# EAGLE board capstoneSchematic (EAGLE 9.6.2)
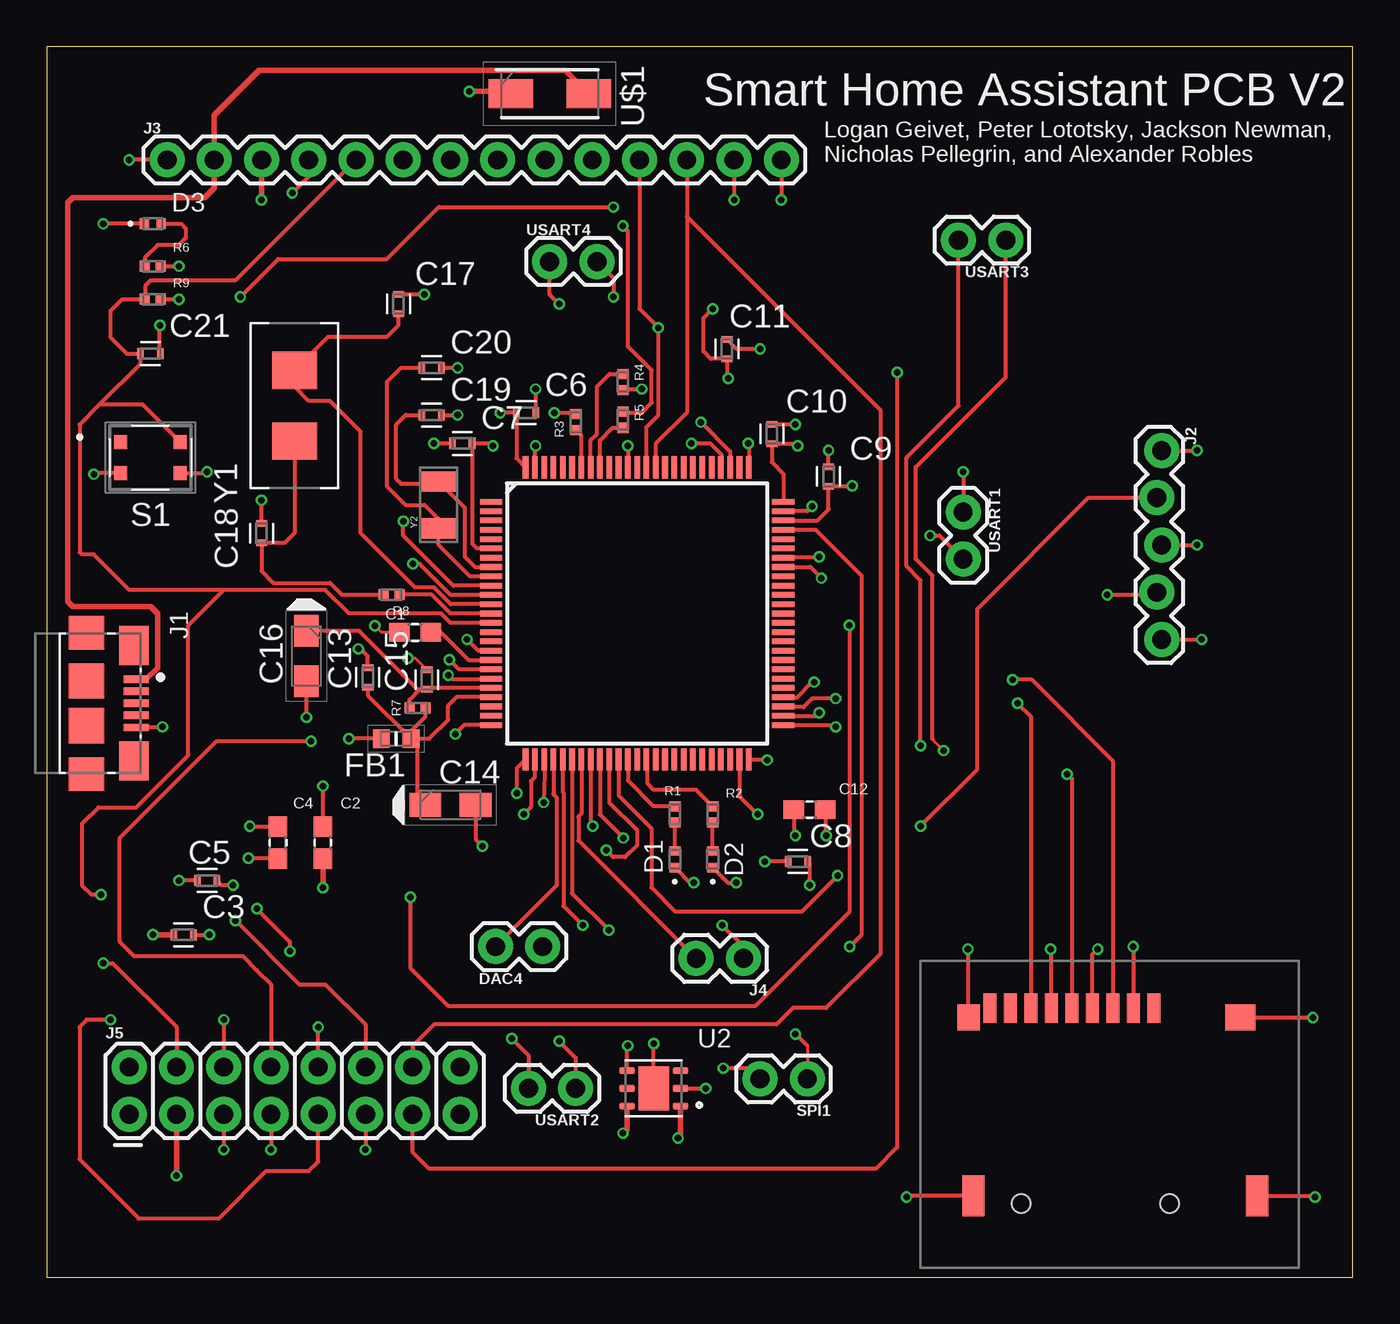
[diagram p0: board, top side]
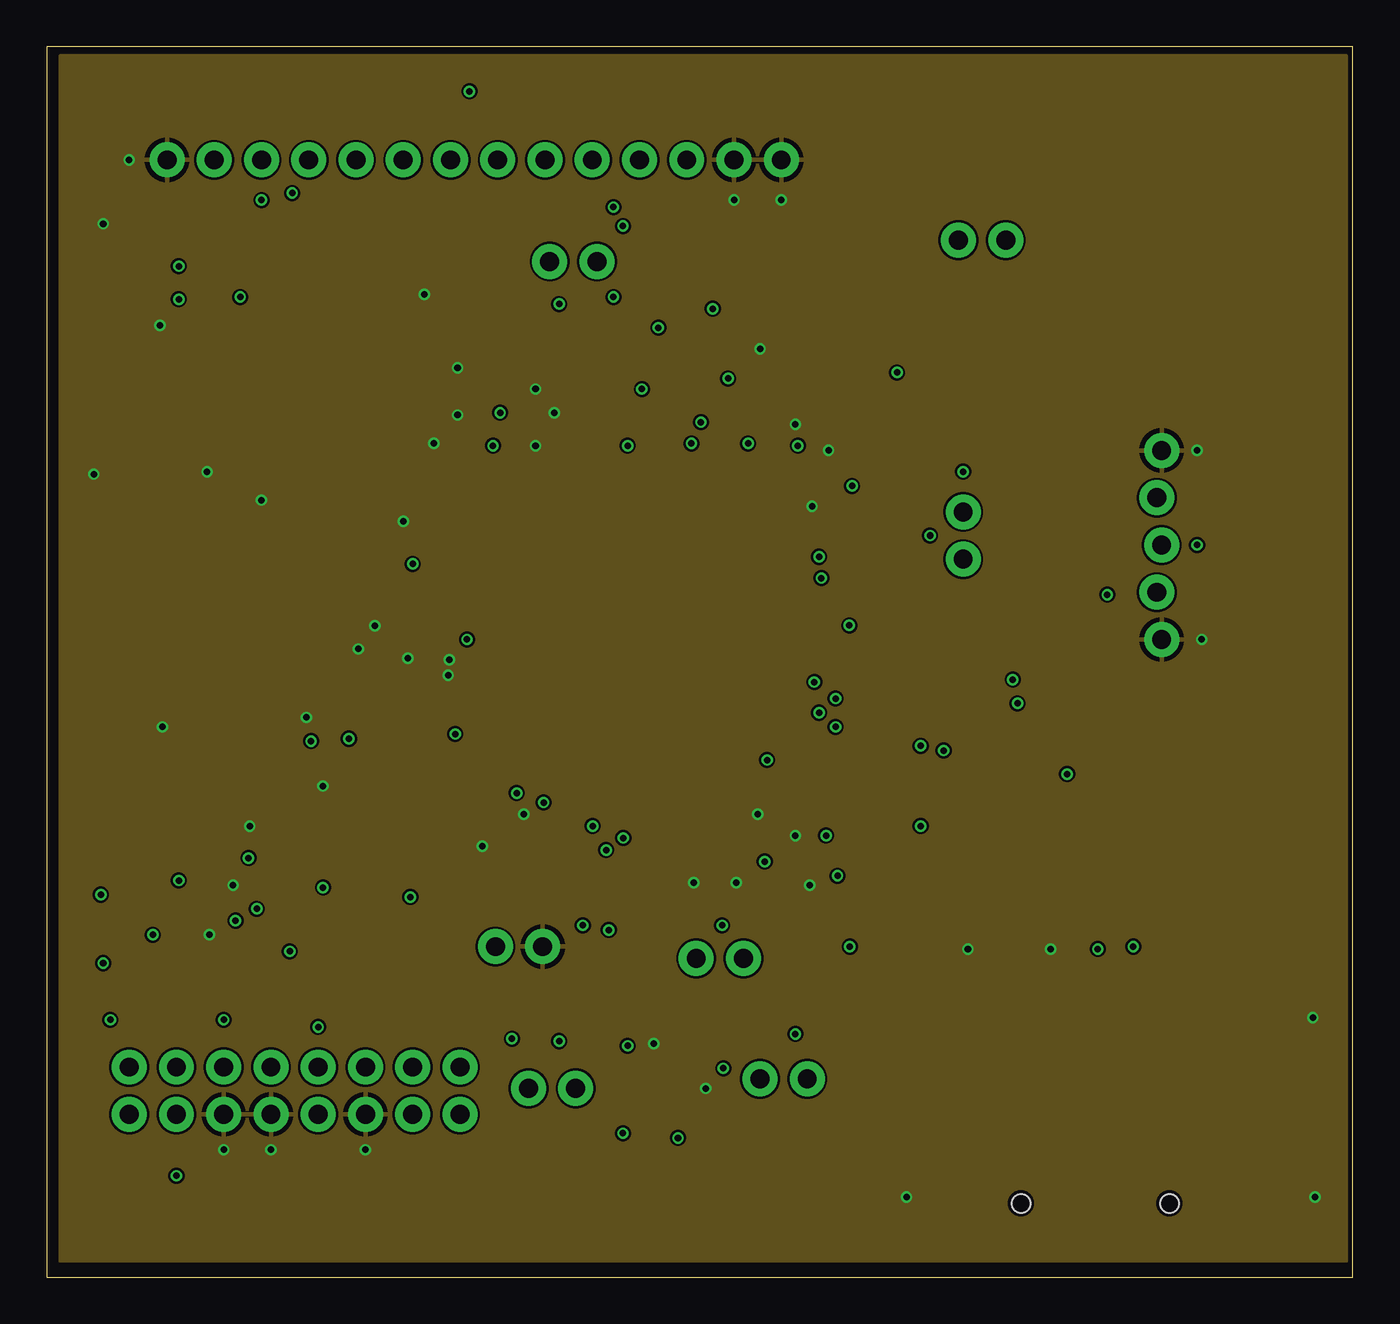
[diagram p1: board, inner layer Route2]
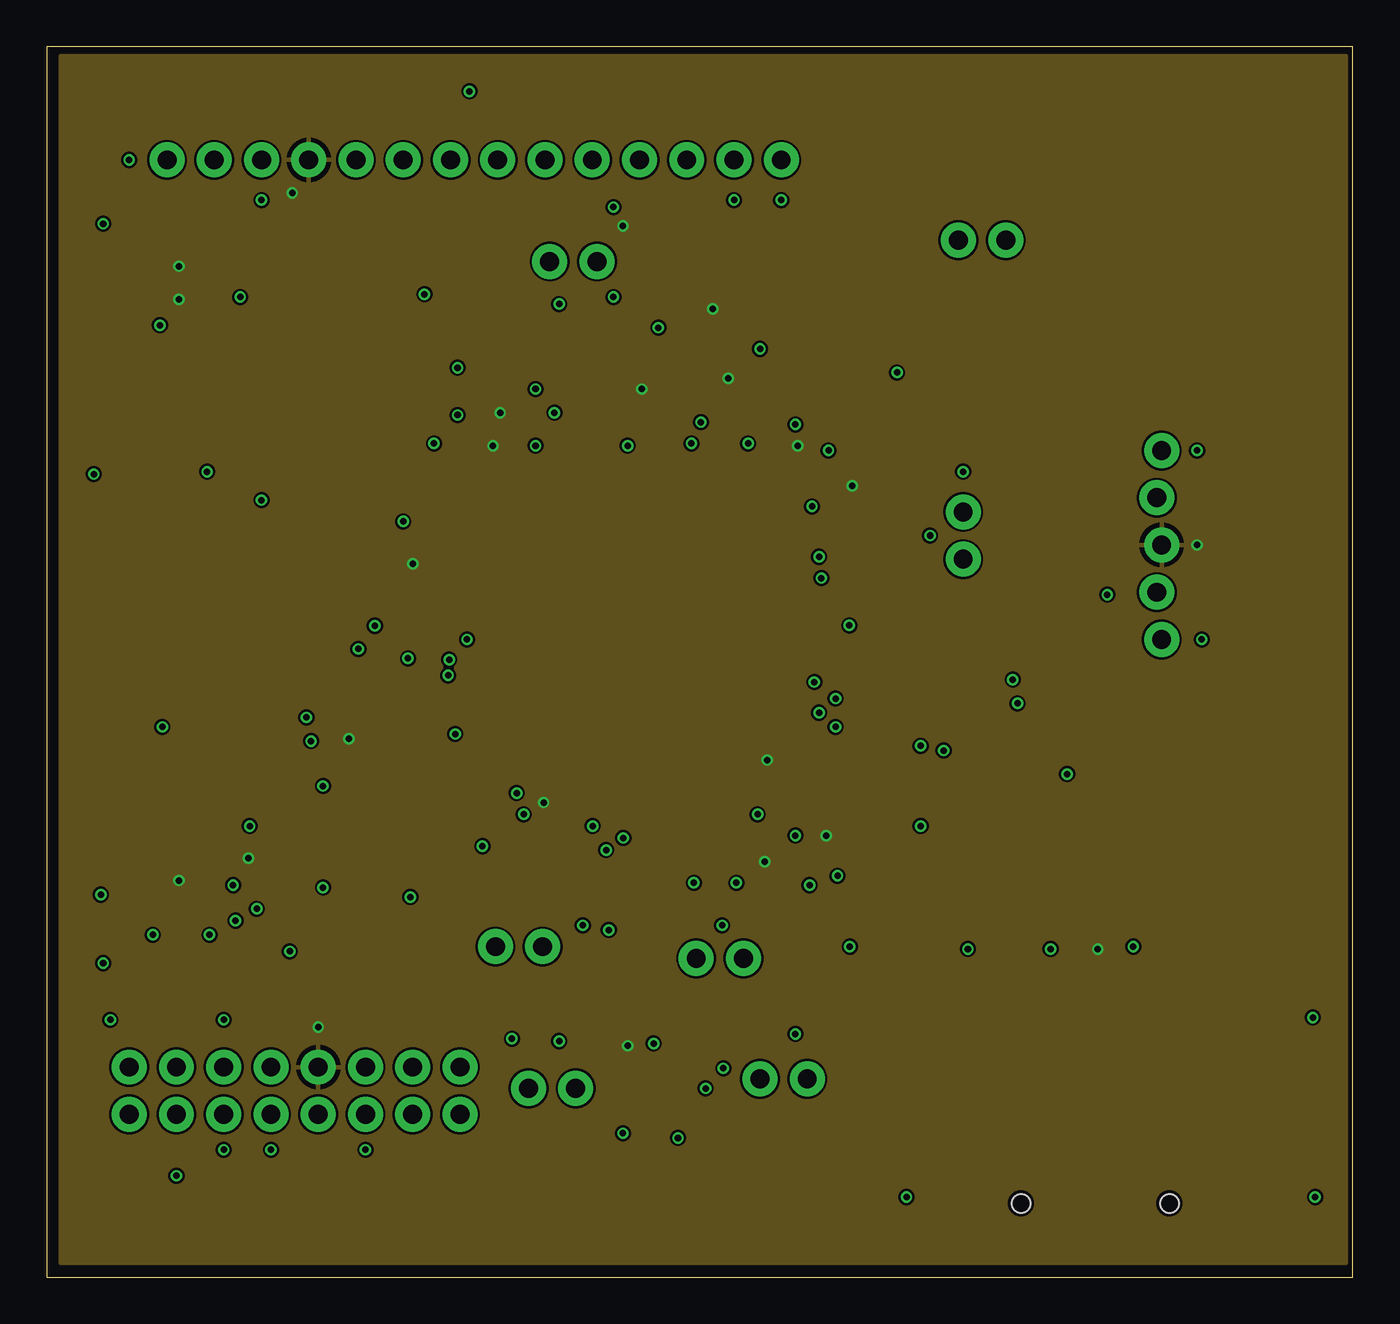
[diagram p2: board, inner layer Route15]
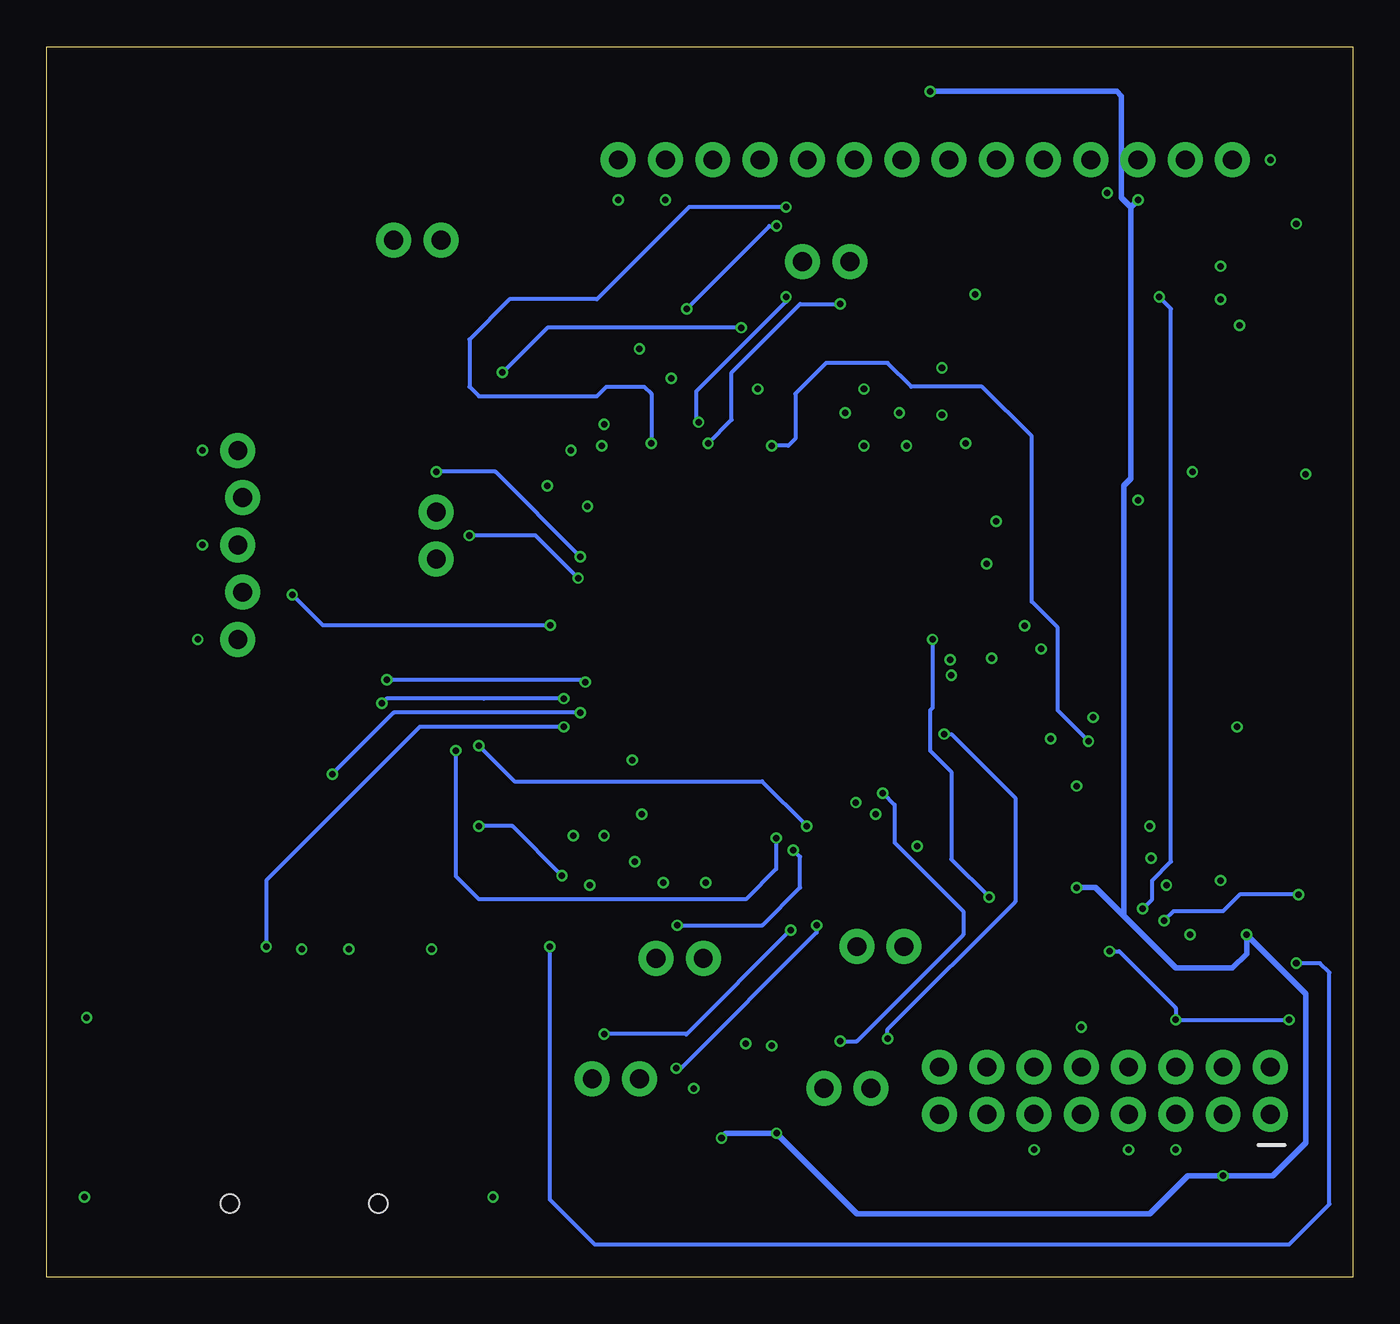
[diagram p3: board, bottom side, seen from below]

Size 70.23 x 66.17 mm. Coordinates in mm from the lower left corner, seen from the top.
Outline: 0,0 70.23,0 70.23,66.17 0,66.17 0,0
Copper layers (1+2*15+16): Top 0.035mm / dielectric 0.2mm / Route2 0.0175mm / dielectric 1.065mm / Route15 0.0175mm / dielectric 0.2mm / Bottom 0.035mm
Design rules "jlcpcb-4layers": minimum track width 3.5mil, minimum drill 0.2mm, track to track 5mil, track to pad 0.2mm, pad to pad 5mil, via to via 0.5mm, smd to smd 5mil, copper to edge 0.2mm, drill to drill 6mil, minimum pad ring 10mil, minimum via ring 0.13mm, stop-mask expansion 0.05mm, vias tented up to drill 16mil, thermal gap 10mil

## Footprints (pad centres in the part's own frame; a part is rotated, then mirrored left to right if it is on the bottom)
CAPC1608X90 = smd 1.1 x 1: 1 -0.85,0; 2 0.85,0
CAPC1005X55N = smd 0.35 x 0.6: 1 -0.525,0; 2 0.525,0
CAPPM3216X180N = smd 1.7 x 1.3: A -1.35,0; C 1.35,0
LED_SML-P11UTT86R = smd 0.5 x 0.6: A 0.45,0; C -0.45,0
1X02 = drill 1.016 pad 1.88: 1 0,0; 2 2.54,0
BEADC1608X95N = smd 0.9 x 1: 1 -0.8,0; 2 0.8,0
AMPHENOL_10118192-0001LF = smd 0.4 x 1.35: 1 -1.3,0; 2 -0.65,0; 3 0,0; 4 0.65,0; 5 1.3,0 | smd 2.1 x 1.6: SH1 -3.1,-0.125; SH2 3.1,-0.125 | smd 1.8 x 1.9: SH3 -3.8,-2.675; SH6 3.8,-2.675 | smd 1.9 x 1.9: SH4 -1.2,-2.675; SH5 1.2,-2.675
1X05_LOCK = drill 1.016 pad 1.88: 1 0,0.127; 2 2.54,-0.127; 3 5.08,0.127; 4 7.62,-0.127; 5 10.16,0.127
1X14 = drill 1.016 pad 1.88: 1 0,0; 2 2.54,0; 3 5.08,0; 4 7.62,0; 5 10.16,0; 6 12.7,0; 7 15.24,0; 8 17.78,0; 9 20.32,0; 10 22.86,0; 11 25.4,0; 12 27.94,0; 13 30.48,0; 14 33.02,0
2X8 = drill 1.016 pad 1.88: 1 0,0; 2 0,2.54; 3 2.54,0; 4 2.54,2.54; 5 5.08,0; 6 5.08,2.54; 7 7.62,0; 8 7.62,2.54; 9 10.16,0; 10 10.16,2.54; 11 12.7,0; 12 12.7,2.54; 13 15.24,0; 14 15.24,2.54; 15 17.78,0; 16 17.78,2.54
RESC1005X40N = smd 0.54 x 0.6: 1 -0.432,0; 2 0.432,0
LL3301FF065QJ = smd 0.7 x 0.75: 1 -1.6,0.825; 2 1.6,0.825; 3 -1.6,-0.825; 4 1.6,-0.825
LQFP100_14X14 = smd 1.2 x 0.3: 1 -7.85,6; 2 -7.85,5.5; 3 -7.85,5; 4 -7.85,4.5; 5 -7.85,4; 6 -7.85,3.5; 7 -7.85,3; 8 -7.85,2.5; 9 -7.85,2; 10 -7.85,1.5; 11 -7.85,1; 12 -7.85,0.5; 13 -7.85,0; 14 -7.85,-0.5; 15 -7.85,-1; 16 -7.85,-1.5; 17 -7.85,-2; 18 -7.85,-2.5; 19 -7.85,-3; 20 -7.85,-3.5; 21 -7.85,-4; 22 -7.85,-4.5; 23 -7.85,-5; 24 -7.85,-5.5; 25 -7.85,-6; 51 7.85,-6; 52 7.85,-5.5; 53 7.85,-5; 54 7.85,-4.5; 55 7.85,-4; 56 7.85,-3.5; 57 7.85,-3; 58 7.85,-2.5; 59 7.85,-2; 60 7.85,-1.5; 61 7.85,-1; 62 7.85,-0.5; 63 7.85,0; 64 7.85,0.5; 65 7.85,1; 66 7.85,1.5; 67 7.85,2; 68 7.85,2.5; 69 7.85,3; 70 7.85,3.5; 71 7.85,4; 72 7.85,4.5; 73 7.85,5; 74 7.85,5.5; 75 7.85,6 | smd 0.3 x 1.2: 26 -6,-7.85; 27 -5.5,-7.85; 28 -5,-7.85; 29 -4.5,-7.85; 30 -4,-7.85; 31 -3.5,-7.85; 32 -3,-7.85; 33 -2.5,-7.85; 34 -2,-7.85; 35 -1.5,-7.85; 36 -1,-7.85; 37 -0.5,-7.85; 38 0,-7.85; 39 0.5,-7.85; 40 1,-7.85; 41 1.5,-7.85; 42 2,-7.85; 43 2.5,-7.85; 44 3,-7.85; 45 3.5,-7.85; 46 4,-7.85; 47 4.5,-7.85; 48 5,-7.85; 49 5.5,-7.85; 50 6,-7.85; 76 6,7.85; 77 5.5,7.85; 78 5,7.85; 79 4.5,7.85; 80 4,7.85; 81 3.5,7.85; 82 3,7.85; 83 2.5,7.85; 84 2,7.85; 85 1.5,7.85; 86 1,7.85; 87 0.5,7.85; 88 0,7.85; 89 -0.5,7.85; 90 -1,7.85; 91 -1.5,7.85; 92 -2,7.85; 93 -2.5,7.85; 94 -3,7.85; 95 -3.5,7.85; 96 -4,7.85; 97 -4.5,7.85; 98 -5,7.85; 99 -5.5,7.85; 100 -6,7.85
SON95P300X300X100-7N = smd 0.84 x 0.4: 1 -1.435,0.95; 2 -1.435,0; 3 -1.435,-0.95; 4 1.435,-0.95; 5 1.435,0; 6 1.435,0.95 | smd 1.625 x 2.365: 7 0,0
DIOM5226X223N = smd 2.4 x 1.55: 1 -2.1,0; 2 2.1,0
MICROSD = smd 1.6 x 0.7: P$1 -3.81,1.1; P$2 -3.81,0; P$3 -3.81,-1.1; P$4 -3.81,-2.2; P$5 -3.81,-3.3; P$6 -3.81,-4.4; P$7 -3.81,-5.5; P$8 -3.81,-6.6; P$9 -3.81,-7.7 | smd 1.4 x 1.2: P$10 -3.31,-8.85 | smd 1.4 x 1.6: P$11 -3.31,5.75 | smd 2.2 x 1.2: P$12 6.29,6.65; P$13 6.29,-8.59 | hole 1: 6.69,1.95; 6.69,-6.03
XTAL_ABLS-8.000MHZ-B2-T = smd 2 x 2.4: 1 -1.9,0; 2 1.9,0
XTAL_ECS-.327-12.5-12QS-TR = smd 1.1 x 1.9: 1 -1.25,0; 2 1.25,0

## Placement (x,y rotation side)
C1  CC0603KRX5R7BB105  [CAPC1608X90]  19.81,34.67 0 top
C2  CC0603KRX5R7BB105  [CAPC1608X90]  14.86,23.37 90 top
C3  CC0402KRX7R7BB104  [CAPC1005X55N]  7.37,18.41 0 top
C4  CC0603KRX5R7BB105  [CAPC1608X90]  12.45,23.37 90 top
C5  CC0402KRX7R7BB104  [CAPC1005X55N]  8.64,21.34 0 top
C6  CC0402KRX7R7BB104  [CAPC1005X55N]  25.78,46.48 0 top
C7  CC0402KRX7R7BB104  [CAPC1005X55N]  22.35,44.83 180 top
C8  CC0402KRX7R7BB104  [CAPC1005X55N]  40.39,22.35 0 top
C9  CC0402KRX7R7BB104  [CAPC1005X55N]  42.04,43.05 90 top
C10  CC0402KRX7R7BB104  [CAPC1005X55N]  38.99,45.34 90 top
C11  CC0402KRX7R7BB104  [CAPC1005X55N]  36.58,49.91 90 top
C12  CC0603KRX5R7BB105  [CAPC1608X90]  41.02,25.15 180 top
C13  CC0402KRX7R7BB104  [CAPC1005X55N]  17.27,32.26 90 top
C14  TAJA105K016RNJ  [CAPPM3216X180N]  21.72,25.4 0 top
C15  CC0402KRX7R7BB104  [CAPC1005X55N]  20.45,32.13 90 top
C16  TAJA105K016RNJ  [CAPPM3216X180N]  13.97,33.4 270 top
C17  CC0402JRNPO9BN200  [CAPC1005X55N]  18.92,52.32 90 top
C18  CC0402JRNPO9BN200  [CAPC1005X55N]  11.56,40.01 90 top
C19  CC0402CRNPO9BN4R7  [CAPC1005X55N]  20.7,46.36 0 top
C20  CC0402CRNPO9BN4R7  [CAPC1005X55N]  20.7,48.9 0 top
C21  CC0402KRX7R7BB104  [CAPC1005X55N]  5.59,49.66 0 top
D1  SML-P12MTT86  [LED_SML-P11UTT86R]  33.78,22.48 90 top
D2  SML-P12MTT86  [LED_SML-P11UTT86R]  35.81,22.48 90 top
D3  SML-P12MTT86  [LED_SML-P11UTT86R]  5.71,56.64 0 top
DAC4  [1X02]  24.13,17.78 0 top
FB1  BK1608HS601-T  [BEADC1608X95N]  18.8,28.96 180 top
J1  10118192-0001LF  [AMPHENOL_10118192-0001LF]  4.83,30.86 270 top
J2  [1X05_LOCK]  59.82,44.45 270 top
J3  [1X14]  6.48,60.07 0 top
J4  [1X02]  37.47,17.14 180 top
J5  [2X8]  4.45,8.76 0 top
R1  RC0402FR-071KL  [RESC1005X40N]  33.78,24.89 270 top
R2  RC0402FR-071KL  [RESC1005X40N]  35.81,24.89 270 top
R3  RC0402FR-071KL  [RESC1005X40N]  28.45,45.97 90 top
R4  RC0402FR-071KL  [RESC1005X40N]  30.99,48.13 270 top
R5  RC0402FR-071KL  [RESC1005X40N]  30.99,46.1 90 top
R6  RC0402FR-071KL  [RESC1005X40N]  5.71,54.36 0 top
R7  RC0402FR-071KL  [RESC1005X40N]  19.94,30.61 0 top
R8  RC0402FR-072KL  [RESC1005X40N]  18.54,36.7 180 top
R9  RC0402FR-0710KL  [RESC1005X40N]  5.71,52.58 0 top
S1  LL3301FF065QJ  [LL3301FF065QJ]  5.59,44.07 0 top
SPI1  [1X02]  40.89,10.67 180 top
U1  STM32L476VCT6  [LQFP100_14X14]  31.75,35.69 0 top
U2  LD39050PU33R  [SON95P300X300X100-7N]  32.64,10.16 180 top
U$1  STPS1L30A  [DIOM5226X223N]  27.05,63.63 0 top
U$2  MICROSDDEVICE  [MICROSD]  58.42,10.67 270 top
USART1  [1X02]  49.28,41.15 270 top
USART2  [1X02]  28.45,10.16 180 top
USART3  [1X02]  51.56,55.75 180 top
USART4  [1X02]  27.05,54.61 0 top
Y1  ABLS-8.000MHZ-B2-T  [XTAL_ABLS-8.000MHZ-B2-T]  13.34,46.86 90 top
Y2  ECS-.327-12.5-12QS-TR  [XTAL_ECS-.327-12.5-12QS-TR]  21.08,41.53 90 top

## Library data of the parts
C1 C2 C4 C12 = ce-capstone; DESCRIPTION: 1µF ±10% 16V Ceramic Capacitor X5R 0603 _1608 Metric_; DIGI-KEY_PART_NUMBER: 311-1444-1-ND; DIGI-KEY_PURCHASE_URL: https://www.digikey.com/product-detail/en/yageo/CC0603KRX5R7BB105/311-1444-1-ND/2833750?utm_source=snapeda&utm_medium=aggregator&utm_campaign=symbol; MF: Yageo; MP: CC0603KRX5R7BB105; PACKAGE: 0603 Yageo
C3 C5-C11 C13 C15 C21 = ce-capstone; DESCRIPTION: 0.1µF ±10% 16V Ceramic Capacitor X7R 0402 _1005 Metric_; DIGI-KEY_PART_NUMBER: 311-1338-1-ND; DIGI-KEY_PURCHASE_URL: https://www.digikey.com/product-detail/en/yageo/CC0402KRX7R7BB104/311-1338-1-ND/2103122?utm_source=snapeda&utm_medium=aggregator&utm_campaign=symbol; MF: Yageo; MP: CC0402KRX7R7BB104; PACKAGE: 0402 Yageo
C14 C16 = ce-capstone; ALLIED_NUMBER: 70474975; ALLIED_PRICE-STOCK: https://www.alliedelec.com/avx-taja105k016r/70474975/; DESCRIPTION: Capacitor tantalum TAJ 1206 1uF 16V AVX 1uF SMD Solid MnO2 Tantalum Electrolytic Capacitor, 16 V dc +/-10%, TAJ Series; HEIGHT: 1.8mm; MANUFACTURER_NAME: AVX; MANUFACTURER_PART_NUMBER: TAJA105K016RNJ; MOUSER_PART_NUMBER: 581-TAJA105K016RNJ; MOUSER_PRICE-STOCK: https://www.mouser.com/Search/Refine.aspx?Keyword=581-TAJA105K016R; RS_PART_NUMBER: 6992804P; RS_PRICE-STOCK: http://uk.rs-online.com/web/p/products/6992804P
C17 C18 = ce-capstone; DESCRIPTION: 20pF ±5% 50V Ceramic Capacitor C0G, NP0 0402 _1005 Metric_; DIGI-KEY_PART_NUMBER: 311-1417-1-ND; DIGI-KEY_PURCHASE_URL: https://www.digikey.com/product-detail/en/yageo/CC0402JRNPO9BN200/311-1417-1-ND/2833723?utm_source=snapeda&utm_medium=aggregator&utm_campaign=symbol; MF: Yageo; MP: CC0402JRNPO9BN200; PACKAGE: 0402 Yageo
C19 C20 = ce-capstone; DESCRIPTION: 4.7pF ±0.25pF 50V Ceramic Capacitor C0G, NP0 0402 _1005 Metric_; DIGI-KEY_PART_NUMBER: 311-1367-1-ND; DIGI-KEY_PURCHASE_URL: https://www.digikey.com/product-detail/en/yageo/CC0402CRNPO9BN4R7/311-1367-1-ND/2103151?utm_source=snapeda&utm_medium=aggregator&utm_campaign=symbol; MF: Yageo; MP: CC0402CRNPO9BN4R7; PACKAGE: 0402 Yageo
D1-D3 = ce-capstone; AVAILABILITY: Unavailable; DESCRIPTION: Green 572nm LED Indication - Discrete 2V 0402 _1006 Metric_; MF: Rohm; MP: SML-P12MTT86; PACKAGE: 0402 Rohm; PRICE: None
DAC4 J2-J5 SPI1 USART1-USART4 = SparkFun-Connectors
FB1 = ce-capstone; DESCRIPTION: Ferrite Chip Bead(Lead Free); HEIGHT: 0.95mm; MANUFACTURER_NAME: Taiyo Yuden; MANUFACTURER_PART_NUMBER: BK1608HS601-T
J1 = ce-capstone; AVAILABILITY: Unavailable; DESCRIPTION: USB - micro B USB 2.0 Receptacle Connector 5 Position Surface Mount, Right Angle; MF: Amphenol ICC; MP: 10118192-0001LF; PACKAGE: None; PRICE: None
R1-R9 = ce-capstone; DESCRIPTION: 510 Ohms ±1% 0.063W, 1/16W Chip Resistor 0402 _1005 Metric_ Moisture Resistant Thick Film; DIGI-KEY_PART_NUMBER: 311-510LRCT-ND; DIGI-KEY_PURCHASE_URL: https://www.digikey.com/product-detail/en/yageo/RC0402FR-07510RL/311-510LRCT-ND/729579?utm_source=snapeda&utm_medium=aggregator&utm_campaign=symbol; MF: Yageo; MP: RC0402FR-07510RL; PACKAGE: 1005 Panasonic Electronic Components
S1 = ce-capstone; DESCRIPTION: Pushbutton Switches 50mA 12VDC F065 7.0mm J-Lead; HEIGHT: 7.3mm; MANUFACTURER_NAME: E-Switch; MANUFACTURER_PART_NUMBER: LL3301FF065QJ; MOUSER_PART_NUMBER: 612-LL3301FF065QJ; MOUSER_PRICE-STOCK: https://www.mouser.com/Search/Refine.aspx?Keyword=612-LL3301FF065QJ
U1 = ce-capstone; FARNELL: 2518171; FLASH: 256kB; SRAM: 128kB
U2 = ce-capstone; AVAILABILITY: Unavailable; DESCRIPTION: Linear Voltage Regulator IC 1 Output 500mA 6-DFN _3x3_; MF: STMicroelectronics; MP: LD39050PU33R; PACKAGE: DFN-6 STMicroelectronics; PRICE: None
U$1 = ce-capstone
U$2 = MicroSDFootprint
Y1 = ce-capstone; AVAILABILITY: Unavailable; DESCRIPTION: 8MHz ±20ppm Crystal 18pF 80 Ohms HC-49/US; MF: Abracon LLC; MP: ABLS-8.000MHZ-B2; PACKAGE: HC-49/US Abracon LLC; PRICE: None
Y2 = ce-capstone; AVAILABILITY: Unavailable; DESCRIPTION: 32.768kHz ±20ppm Crystal 12.5pF 90 kOhms 2-SMD, No Lead; MF: ECS Inc.; MP: ECS-.327-12.5-12QS-TR; PACKAGE: SMD-2 ECS International; PRICE: None

## Nets
3V3: C4.1 C5.1 C6.1 C7.1 C8.1 C9.1 C10.1 C11.1 C12.1 FB1.2 J2.3 J3.4 J5.10 R4.2 R5.2 R6.2 R9.2 U1.6 U1.11 U1.28 U1.50 U1.73 U1.75 U1.100 U2.4 U$2.P$4
5V: C2.1 C3.1 J3.3 J5.3 U2.1 U2.6 U$1.1
5V_IN: J1.1 J3.2 U$1.2
BOOT0: J3.6
CS: U1.51 U$2.P$2
DFSDM1_CKOUT: J2.4 U1.17
DFSDM1_DATIN0: J2.2 U1.36
GND: C1.1 C2.2 C3.2 C4.2 C5.2 C6.2 C7.2 C8.2 C9.2 C10.2 C11.2 C12.2 C13.2 C14.C C15.2 C16.C C17.2 C18.2 C19.2 C20.2 C21.2 D1.C D2.C D3.C DAC4.2 J1.5 J2.1 J2.5 J3.1 J3.13 J3.14 J5.5 J5.7 J5.11 R3.2 S1.3 S1.4 U1.10 U1.19 U1.20 U1.27 U1.49 U1.74 U1.99 U2.2 U2.7 U$2.P$6 U$2.P$10 U$2.P$11 U$2.P$12 U$2.P$13
GPIO_CS: J4.1 U1.35
I2C1_SDA: J3.7
I2C_SCL: J3.8
LED_G: J3.10
LED_R: J3.9
MISO: U1.53 U$2.P$7
MOSI: U1.54 U$2.P$3
N$1: R2.1 U1.39
N$2: R1.1 U1.37
N$3: D1.A R1.2
N$4: D2.A R2.2
N$5: R3.1 U1.94
N$6: R4.1 U1.93
N$7: R5.1 U1.92
N$8: D3.A R6.1
N$10: C1.2 U1.18
N$12: C18.1 R8.2 Y1.1
N$15: DAC4.1 U1.29
N$21: S1.1
NRST: C21.1 J3.5 J5.12 R9.1 S1.2 U1.14
PC14-OSC32-IN: C19.1 U1.8 Y2.2
PC15-OSC32-OUT: C20.1 U1.9 Y2.1
PH0-OSC-IN: C17.1 U1.12 Y1.2
PH1-OSC-OUT: R8.1 U1.13
SCK: U1.52 U$2.P$5
SPI1_MISO: SPI1.1 U1.31
SPI1_MOSI: J4.2 U1.32
SPI1_SCK: SPI1.2 U1.30
SWCLK: J5.6 J5.9 U1.76
SWDIO: J5.4 U1.72
SWO: J5.8 U1.89
USART1_RX: U1.69 USART1.1
USART1_TX: U1.68 USART1.2
USART2_RX: U1.26 USART2.1
USART2_TX: U1.25 USART2.2
USART3_RX: U1.34 USART3.1
USART3_TX: U1.33 USART3.2
USART4_RX: U1.79 USART4.1
USART4_TX: U1.78 USART4.2
USART_RX: J3.11 J5.13 U1.87
USART_TX: J3.12 J5.14 U1.86
VDDA: C13.1 C14.A FB1.1 R7.2 U1.22
VREF_PLUS: C15.1 C16.A R7.1 U1.21

## Tracks (layer width: path | path; a pad name or v marks a point on that pad's centre or on a via)
3V3  (via drill 0.35)
  Top 0.203: C8.1 v38.61,22.35 | FB1.2 v16.26,28.96 | R4.2 31.04,47.75 v32,47.75 | R5.2 31.04,46.48 32,46.48 32.53,47.01 32.53,48.77 31.27,50.04 31.24,50.04 31.24,56.26 v30.99,56.52 | U1.28 26.8,27.79 v26.72,25.53 | U2.4 31.2,12.41 v31.24,12.45 | C5.1 v7.11,21.34 | J3.4 14.1,59.18 v13.21,58.29 | R9.2 v7.11,52.58 | R6.2 v7.11,54.36 | U1.6 23.14,39.19 22.88,39.44 C7.1 23.88,44.83 v24,44.7 | U1.11 21.73,36.69 20.07,38.35 v19.68,38.35 | C4.1 10.88,22.52 v10.86,22.54 | U1.50 38.71,27.84 v38.73,27.81 | v41.91,23.75 41.87,23.79 C12.1 | U$2.P$4 56.22,17.36 v56.52,17.65 | U1.100 25.26,44.03 C6.1 v24.38,46.48 | U1.75 39.62,41.71 39.62,43.18 38.99,43.82 C10.1 40.28,44.81 v40.39,44.7 | U1.73 41.45,40.69 42.04,41.27 C9.1 43.29,42.53 v43.31,42.55 | v36.64,48.32 36.58,48.39 C11.1 35.7,49.39 35.31,49.78 35.31,51.56 v35.81,52.07 | J5.10 v14.61,13.46 | J2.3 v61.85,39.37
  Bottom 0.203: v30.99,56.52 31.37,56.52 v35.81,52.07
  pour Route15: 0.76,65.66 69.85,65.66 69.85,0.76 0.76,0.76
5V  (via drill 0.35)
  Top 0.305: J3.3 v11.56,57.91 | C2.1 v14.86,20.95 | C3.1 v5.71,18.41 | v22.73,63.75 24.89,63.75 24.95,63.7 U$1.1 | U2.6 31.2,7.96 v30.99,7.75 | U2.1 34.07,7.62 v33.95,7.49 | J5.3 v6.99,5.46
  Bottom 0.305: v11.56,57.91 11.94,57.53 | 11.94,57.53 11.94,42.93 12.32,42.55 12.32,19.43 12.44,19.56 12.44,19.55 | 12.44,19.55 9.53,16.64 6.48,16.64 5.71,17.4 v5.71,18.41 2.54,15.24 2.54,7.24 4.32,5.46 v6.99,5.46 8.89,5.46 10.92,3.43 26.67,3.43 v30.99,7.75 33.69,7.75 v33.95,7.49 | v14.86,20.95 13.84,20.95 12.44,19.55 | v22.73,63.75 12.7,63.75 12.45,63.5 12.45,58.04 11.94,57.53
5V_IN
  Top 0.203: J1.1 5.3,32.16 5.33,32.13
  Top 0.305: 5.33,32.13 5.97,32.77 5.97,35.69 5.59,36.07 1.4,36.07 1.14,36.32 1.14,57.79 1.4,58.04 8.51,58.04 9.02,58.55 J3.2 9.02,62.48 11.43,64.9 27.88,64.9 U$1.2
CS  (via drill 0.35)
  Top 0.203: U1.51 42.32,29.69 v42.42,29.59 | v58.42,17.78 U$2.P$2
  Bottom 0.203: v42.42,29.59 50.16,29.59 58.42,21.34 v58.42,17.78
DFSDM1_CKOUT  (via drill 0.35)
  Top 0.152: 43.18,35.05 v43.15,35.05
  Top 0.203: U1.17 23.21,33.69 v22.61,34.29 | v19.56,20.45 19.56,16.64 21.59,14.61 38.1,14.61 43.18,19.69 43.18,35.05 | v57.02,36.7 59.56,36.7 J2.4
  Bottom 0.203: v22.61,34.29 22.61,30.61 22.73,30.49 22.73,28.32 21.59,27.18 21.59,22.48 v19.56,20.45 | v43.15,35.05 55.37,35.05 v57.02,36.7
DFSDM1_DATIN0  (via drill 0.35)
  Top 0.203: v42.52,21.59 40.61,19.69 33.78,19.69 32.51,20.95 32.51,24.13 30.75,25.89 U1.36 | v46.99,24.26 50.04,27.3 50.04,35.94 56.01,41.91 J2.2
  Bottom 0.203: v42.52,21.59 45.19,24.26 v46.99,24.26
GND  (via drill 0.35)
  Top 0.152: C15.2 19.83,33.27 v19.43,33.27 | C1.1 18.01,34.67 v17.65,35.03
  Top 0.203: J1.5 4.86,29.59 v6.22,29.59 | U1.20 23.86,32.15 21.81,32.15 v21.59,32.37 | v38.35,49.91 37.1,49.91 C11.2 | C14.C 23.07,23.54 v23.43,23.18 | C16.C v13.97,30.1 | v27.3,46.48 28.37,46.48 R3.2 | C18.2 v11.56,41.78 | C17.2 v20.32,52.85 | C7.2 v20.83,44.83 | U1.10 21.87,37.19 19.18,39.88 v19.18,40.64 | C5.2 9.41,21.08 v10.03,21.08 | C3.2 v8.76,18.41 | D3.C v3.05,56.64 | C21.2 6.1,49.67 v6.1,51.18 | J3.13 v36.96,57.91 | v25.65,24.89 26.04,25.28 26.04,26.68 26.25,26.89 U1.27 | C2.2 v14.86,26.42 | C13.2 17.27,33.4 16.89,33.78 v16.76,33.78 | C19.2 v22.1,46.36 | C20.2 v22.1,48.9 | U1.19 22.17,32.69 v21.65,33.21 | C4.2 10.96,24.22 v10.92,24.26 | U2.2 v35.43,10.16 | C9.2 v42.04,44.45 | U1.74 40.89,41.19 v41.15,41.45 | v40.26,45.85 40.24,45.86 C10.2 | U1.49 37.28,27.81 37.28,25.84 v38.23,24.89 | C12.2 40.17,23.84 v40.26,23.75 | C8.2 41.02,22.24 v41.02,21.08 | D1.C 34.6,21.21 v34.8,21.21 | D2.C 36.63,21.21 v37.08,21.21 | J3.14 v39.5,57.91 | J3.1 v4.45,60.07 | U2.7 v32.64,12.57 | U$2.P$10 49.57,17.61 v49.53,17.65 | U$2.P$6 54.02,17.61 v53.98,17.65 | U$2.P$11 v68.06,13.98 v68.07,13.97 | U$2.P$12 68.14,4.38 v68.2,4.32 | U$2.P$13 46.29,4.38 v46.23,4.32 | U1.99 26.25,44.66 v26.29,44.7 | C6.2 26.31,47.73 v26.29,47.75 | S1.4 8.57,43.24 v8.64,43.31 | S1.3 2.6,43.24 v2.54,43.18 | J5.5 v9.53,6.86 | J5.7 v12.06,6.86 | J5.11 v17.14,6.86 | J2.5 v62.1,34.29 | J2.1 v61.85,44.45
  pour Route2: 0.76,65.66 69.85,65.66 69.85,0.89 0.76,0.89
GPIO_CS  (via drill 0.35)
  Top 0.203: U1.35 30.25,25.53 31.77,24.01 31.77,23.26 31.1,22.59 30.47,22.59 v30.09,22.97 | v36.32,18.92 37.47,17.78 J4.1
  Bottom 0.203: v36.32,18.92 31.75,18.92 29.72,20.95 29.72,22.61 v30.09,22.97
MISO  (via drill 0.35)
  Top 0.203: U1.53 39.63,30.66 40.69,30.66 41.15,31.12 v42.42,31.12 | v52.2,30.86 52.92,30.14 U$2.P$7
  Bottom 0.203: v42.42,31.12 46.74,31.12 51.94,31.12 v52.2,30.86
MOSI  (via drill 0.35)
  Top 0.152: 41.15,32 v41.27,32
  Top 0.203: U1.54 39.63,31.16 40.3,31.16 41.15,32 | v51.94,32.13 52.96,32.13 57.32,27.77 U$2.P$3
  Bottom 0.203: v51.94,32.13 41.4,32.13 v41.27,32
N$1
  Top 0.203: U1.39 32.28,27.8 32.28,26.57 32.64,26.21 34.92,26.21 R2.1
N$2
  Top 0.203: U1.37 31.25,26.71 32.64,25.32 R1.1
N$3
  Top 0.203: D1.A R1.2
N$4
  Top 0.203: D2.A R2.2
N$5
  Top 0.203: U1.94 28.75,45.24 R3.1
N$6
  Top 0.203: U1.93 29.25,45 29.59,45.34 29.59,47.88 30.28,48.57 R4.1
N$7
  Top 0.203: U1.92 29.75,44.99 30.43,45.67 R5.1
N$8
  Top 0.203: D3.A 7.24,56.64 7.49,56.39 7.49,55.88 7.11,55.5 5.97,55.5 5.28,54.81 R6.1
N$10
  Top 0.203: C1.2 21.21,34.67 22.69,33.19 U1.18
N$12
  Top 0.203: R8.2 15.88,36.7 15.24,37.34 12.19,37.34 11.56,37.97 C18.1 12.81,39.48 13.34,40.01 Y1.1
N$15
  Top 0.203: U1.29 27.25,25.97 27.43,25.79 27.43,21.08 DAC4.1
NRST  (via drill 0.35)
  Top 0.203: U1.14 21.71,35.19 21.21,35.69 16.26,35.69 14.99,36.96 9.53,36.96 | 9.53,36.96 4.45,36.96 2.54,38.86 1.91,38.86 1.78,38.99 1.78,45.85 2.86,46.93 | J3.5 10.16,53.59 5.59,53.59 5.33,53.34 5.33,52.63 R9.1 4.06,52.58 3.43,51.94 3.43,50.55 4.32,49.66 C21.1 5.06,49.13 2.86,46.93 | 9.53,36.96 7.62,35.05 7.62,28.07 4.83,25.27 2.79,25.27 1.91,24.38 1.91,21.08 2.41,20.57 v2.92,20.57 | 2.86,46.93 5.15,46.93 S1.2 | J5.12 17.14,13.59 14.99,15.75 13.59,15.75 v10.16,19.18
  Bottom 0.203: v2.92,20.57 6.1,20.57 6.99,19.69 9.65,19.69 v10.16,19.18
PC14-OSC32-IN
  Top 0.203: C19.1 19.3,46.36 18.8,45.85 18.8,42.93 19.05,42.67 20.98,42.67 Y2.2 22.48,41.38 22.48,38.75 23.04,38.19 U1.8
PC15-OSC32-OUT
  Top 0.203: C20.1 19.05,48.9 18.29,48.13 18.29,42.55 19.3,41.53 20.32,41.53 21.08,40.77 Y2.1 21.08,39.37 22.77,37.69 U1.9
PH0-OSC-IN
  Top 0.203: U1.12 21.73,36.19 20.83,37.08 19.81,37.08 16.89,40.01 16.89,45.47 15.24,47.12 14.1,47.12 13.34,47.88 Y1.2 15.12,50.55 18.29,50.55 18.92,51.18 C17.1
PH1-OSC-OUT
  Top 0.203: U1.13 21.72,35.69 20.7,36.7 R8.1
SCK  (via drill 0.35)
  Top 0.203: U1.52 39.63,30.16 41.33,30.16 v41.53,30.35 | v54.86,27.05 55.12,26.8 U$2.P$5
  Bottom 0.203: v41.53,30.35 51.56,30.35 v54.86,27.05
SPI1_MISO  (via drill 0.35)
  Top 0.152: 40.89,12.45 SPI1.1
  Top 0.203: v40.26,13.08 40.89,12.45 | U1.31 28.25,20.65 v30.23,18.67
  Bottom 0.203: v40.26,13.08 35.83,13.08 35.83,13.06 v30.23,18.67
SPI1_MOSI
  Top 0.203: U1.32 28.75,24.93 28.59,24.77 28.59,23.48 J4.2
SPI1_SCK  (via drill 0.35)
  Top 0.203: U1.30 27.75,26.1 27.79,26.06 27.79,19.97 v28.83,18.92 | v36.39,11.24 37.78,11.24 SPI1.2
  Bottom 0.203: v36.39,11.24 36.13,11.24 28.83,18.54 v28.83,18.92
SWCLK  (via drill 0.35)
  Top 0.203: v10.41,52.7 12.45,54.74 18.29,54.74 21.08,57.53 v30.48,57.53 | v37.72,44.83 37.75,44.83 U1.76 | v11.3,19.81 13.08,18.03 v13.08,17.53 | v9.53,13.84 J5.6 | v3.43,13.84 2.16,13.84 1.78,13.46 1.78,6.35 4.95,3.17 9.27,3.17 11.81,5.71 14.1,5.71 14.61,6.22 J5.9
  Bottom 0.203: v11.3,19.81 10.79,20.32 10.79,21.34 9.78,22.35 9.78,52.07 v10.41,52.7 | v30.48,57.53 35.69,57.53 40.64,52.58 45.34,52.58 47.5,50.42 47.5,47.88 46.99,47.37 40.64,47.37 40.13,47.88 38.1,47.88 37.72,47.5 v37.72,44.83 | v13.08,17.53 12.57,17.53 9.53,14.48 v9.53,13.84 v3.43,13.84
SWDIO  (via drill 0.35)
  Top 0.203: U1.72 41.35,40.19 43.81,37.72 43.81,18.41 v43.18,17.78 | v3.05,16.89 3.56,16.89 6.99,13.46 J5.4
  Bottom 0.203: v43.18,17.78 43.18,4.19 40.77,1.78 3.43,1.78 1.27,3.94 1.27,16.38 1.78,16.89 v3.05,16.89
SWO  (via drill 0.35)
  Top 0.203: v31.24,44.7 v31.25,44.7 U1.89 | v14.22,28.83 9.14,28.83 3.94,23.62 3.94,18.03 4.7,17.27 10.54,17.27 11.3,16.5 12.06,15.74 J5.8
  Bottom 0.203: v31.24,44.7 30.35,44.7 29.97,45.09 29.97,47.5 28.32,49.15 25.02,49.15 23.75,47.88 19.94,47.88 17.27,45.21 17.27,36.32 15.88,34.93 15.88,30.48 v14.22,28.83
USART1_RX  (via drill 0.35)
  Top 0.203: U1.69 39.65,38.73 v41.53,38.73 | v49.28,43.31 USART1.1
  Bottom 0.203: v41.53,38.73 46.1,43.31 v49.28,43.31
USART1_TX  (via drill 0.35)
  Top 0.203: U1.68 41.06,38.19 v41.66,37.59 | v47.5,39.88 48.01,39.88 USART1.2
  Bottom 0.203: v41.66,37.59 43.94,39.88 v47.5,39.88
USART2_RX  (via drill 0.35)
  Top 0.203: U1.26 25.27,27.36 v25.27,26.03 | v27.56,12.7 28.45,11.81 USART2.1
  Bottom 0.203: v25.27,26.03 24.64,25.4 24.64,23.37 20.95,19.69 20.95,18.41 26.67,12.7 v27.56,12.7
USART2_TX  (via drill 0.35)
  Top 0.203: U1.25 22.45,29.69 v21.97,29.21 | v25.02,12.83 25.91,11.94 USART2.2
  Bottom 0.203: v25.02,12.83 25.02,13.33 18.16,20.19 18.16,25.78 21.59,29.21 v21.97,29.21
USART3_RX  (via drill 0.35)
  Top 0.152: v48.23,28.32 47.62,28.92
  Top 0.203: 47.62,28.92 47.62,37.72 46.74,38.61 46.74,43.56 51.56,48.39 USART3.1 | U1.34 29.75,24.88 v31,23.62
  Bottom 0.203: v48.23,28.32 48.23,21.56 46.99,20.32 32.64,20.32 31,21.95 v31,23.62
USART3_TX  (via drill 0.35)
  Top 0.203: U1.33 29.25,24.36 v29.36,24.26 | v46.99,28.58 46.99,37.47 46.23,38.23 46.23,44.07 49.02,46.86 USART3.2
  Bottom 0.203: v29.36,24.26 31.77,26.67 45.08,26.67 v46.99,28.58
USART4_RX  (via drill 0.35)
  Top 0.203: U1.79 36.28,43.57 36.28,44.24 35.69,44.83 v34.67,44.83 | v27.56,52.32 27.05,52.83 USART4.1
  Bottom 0.203: v34.67,44.83 33.4,46.1 33.4,48.64 29.72,52.32 v27.56,52.32
USART4_TX  (via drill 0.35)
  Top 0.203: USART4.2 30.48,53.72 v30.48,52.7 | U1.78 36.75,44.4 v35.18,45.97
  Bottom 0.203: v30.48,52.7 30.48,52.45 35.31,47.62 35.31,46.1 v35.18,45.97
USART_RX  (via drill 0.35)
  Top 0.203: U1.87 32.25,45.71 32.89,46.35 v32.89,51.05 31.88,52.07 J3.11 | v45.72,48.64 45.72,6.98 44.58,5.84 20.83,5.84 20.57,5.84 19.68,6.73 J5.13
  Bottom 0.203: v32.89,51.05 43.31,51.05 v45.72,48.64
USART_TX
  Top 0.203: U1.86 32.75,44.82 34.42,46.48 34.42,57.02 | J3.12 34.42,57.02 | 34.42,57.02 44.83,46.61 44.83,17.4 41.91,14.48 40.12,14.48 39.23,13.59 20.83,13.59 19.68,12.45 J5.14
VDDA
  Top 0.203: FB1.1 19.94,28.96 | 19.94,28.96 20.57,28.96 21.59,29.97 21.59,30.73 22.04,31.19 U1.22 | FB1.1 17.27,31.28 C13.1 | FB1.1 19.6,29.38 20.37,30.15 R7.2 | C14.A 19.94,25.83 19.94,28.96
VREF_PLUS
  Top 0.152: 20.53,31.69 C15.1
  Top 0.203: C15.1 20.07,31.61 | 20.07,31.61 19.96,31.61 16.81,34.75 C16.A | R7.1 19.51,31.05 20.07,31.61 | U1.21 20.53,31.69

## Text on the board
tPlace: Smart Home Assistant PCB V2 | Logan Geivet, Peter Lototsky, Jackson Newman, / Nicholas Pellegrin, and Alexander Robles